# Altium PCB Module Hub.PcbDoc
Units mil, origin at the board's own origin, x right, y up, seen from the top; angles counter-clockwise.
Board outline 5205 x 1250 mil, 2 copper layers (Top Layer, Bottom Layer); 57 components, 50 nets, 236 pads, 153 vias.
Unrouted connection lines stored in the file: 2.
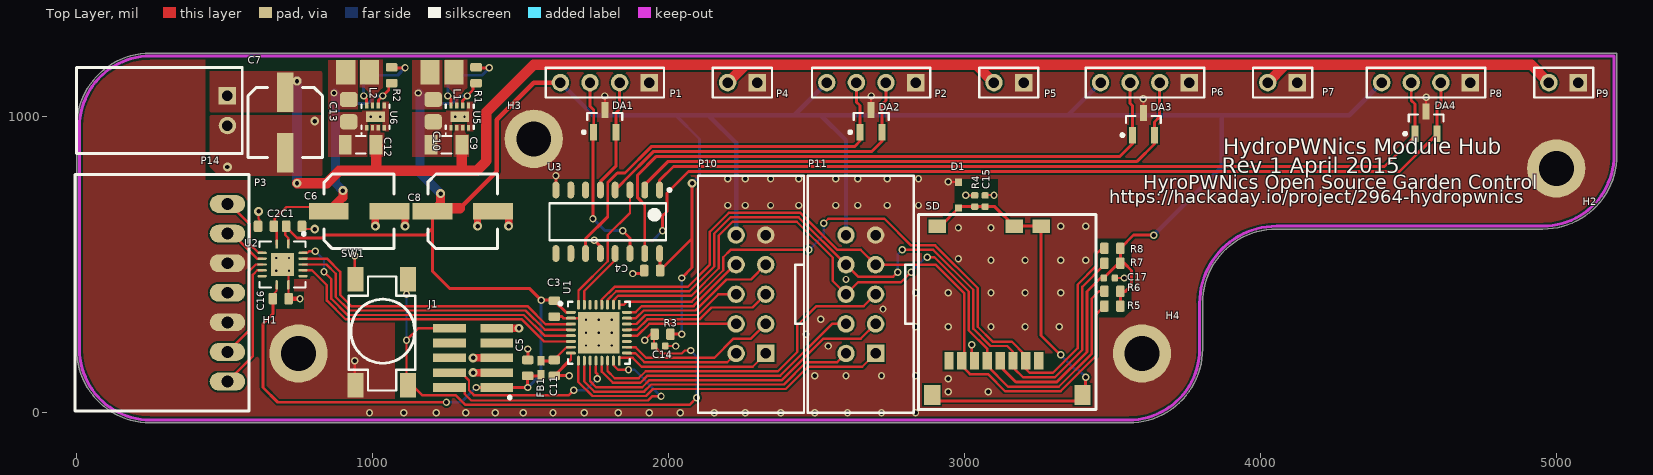
[diagram p0: Top Layer view]
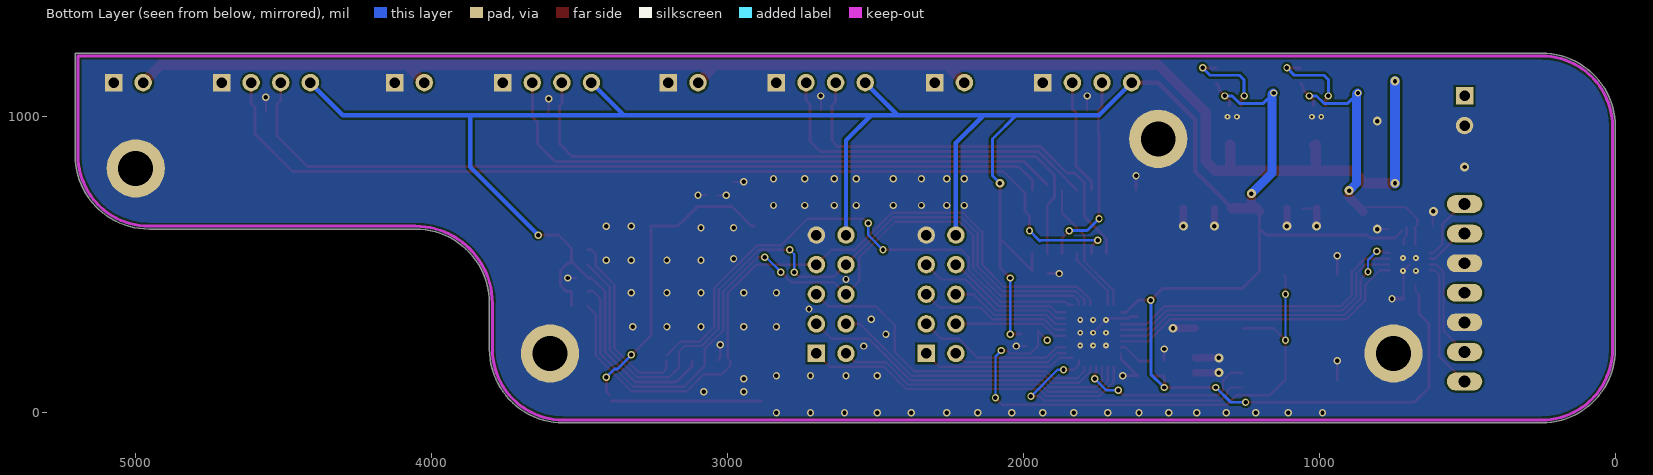
[diagram p1: Bottom Layer view, seen from below]

## Layer stack, top to bottom
Top Solder: solder mask 0.4, Solder Resist, Dk 3.5
Top Layer: signal copper 1.4
Dielectric 1: dielectric 12.6, FR-4, Dk 4.8
Bottom Layer: signal copper 1.4
Bottom Solder: solder mask 0.4, Solder Resist, Dk 3.5

## Board outline
250,-35 cw(c250,215) 0,215 0,965 cw(c250,965) 250,1215 5205,1215 5205,870 cw(c4955,870) 4955,620 4055,620 ccw(c4055,370) 3805,370 3805,215 cw(c3555,215) 3555,-35

## Design rules (kind name [scope] priority, off if disabled: settings)
Clearance [All] p1: gap=7
PlaneConnect [All] p1: planeconnectstyle=Direct reliefexpansion=20 reliefentries=4 reliefconductorwidth=10 reliefairgap=10
PolygonConnect [All] p1: connectstyle=Direct reliefconductorwidth=10 reliefentries=4 polygonreliefangle="90 Angle" airgapwidth=10
RoutingVias [All] p1: holewidth=28 width=50 viastyle="Through Hole" minholewidth=28 minwidth=50 maxholewidth=28 maxwidth=50
SolderMaskExpansion [All] p1: expansion=4
UnpouredPolygon [All] p1: allowunpoured=FALSE
Width [All] p1: maxlimit=100 minlimit=7 preferedwidth=8
28 further rules are at their usual default settings.

## Components (designator, comment, footprint, x,y, rotation, side; value= is the part's Value field where it differs from the comment)
C1 "100nF" C0603 735,630 r0 top
C2 "100nF" C0603 640,630 r180 top
C3 "100nF" C0603 1614.49,351.26 r270 top
C4 "100nF" C0603 1945,480 r180 top
C5 "0603" C0603 1524.49,151.26 r270 top
C6 "EEE-1VA101XP" EEE-1VA101XP 955,680 r180 top
C7 "EEE-1VA101XP" EEE-1VA101XP 705,980 r90 top
C8 "EEE-1VA101XP" EEE-1VA101XP 1305,680 r180 top
C9 "10uF 50V" C1206 1250,905 r180 top
C10 "0603" C0805 1205,1020 r90 top
C11 "0603" C0603 1614.49,151.26 r90 top
C12 "10uF 50V" C1206 960,905 r180 top
C13 "0603" C0805 920,1020 r90 top
C14 "100nF" C0402 1970,225 r0 top
C15 "0402" C0402 3070,715 r270 top
C16 "100nF" C0603 690,385 r0 top
C17 "0402" C0402 3490,455 r180 top
D1 "RSB39VTE-17" SOD323-R 2980,735 r270 top
DA1 "PESDxL2BT" SOT95P230X110-3N 1785,985 r90 top
DA2 "PESDxL2BT" SOT95P230X110-3N 2685,985 r90 top
DA3 "PESDxL2BT" SOT95P230X110-3N 3605,975 r90 top
DA4 "PESDxL2BT" SOT95P230X110-3N 4560,980 r90 top
FB1 "BLM15HG601SN1D" BLM18PG121SN1D 1569.49,151.26 r90 top
H1 "M3 Hole" Hole-3mm#1 750,200 r0 top
H2 "M3 Hole" Hole-3mm#2 5060,805 r0 top
H3 "M3 Hole" Hole-3mm#3 1550,835 r0 top
H4 "M3 Hole" Hole-3mm#4 3610,270 r0 top
J1 "FTSH-105-XX-X-DV" FTSH-105-XX-X-DV 1340,185 r270 top
L1 "VLS252012T-2R2M1R3" VLS252012T-2R2M1R3 1235,1150 r180 top
L2 "VLS252012T-2R2M1R3" VLS252012T-2R2M1R3 950,1150 r180 top
P1 "Header 4" HDR1X4 1935,1115 r180 top
P2 "Header 4" HDR1X4 2835,1115 r180 top
P3 "Molex - 0705430006" 0705530041 510,705 r270 top
P4 "Header 2" HDR1X2 2300,1115 r180 top
P5 "Header 2" HDR1X2 3200,1115 r180 top
P6 "Header 4" HDR1X4 3760,1115 r180 top
P7 "Header 2" HDR1X2 4125,1115 r180 top
P8 "Header 4" HDR1X4 4710,1115 r180 top
P9 "Header 2" HDR1X2 5075,1115 r180 top
P10 "CNCTech 3020-10-0100-00" 3020-10-0100-00 2328.79,400 r90 top
P11 "CNCTech 3020-10-0100-00" 3020-10-0100-00 2700,400 r90 top
P14 "Molex 0705530001" 0705530001 510,1070 r270 top
R1 "100K" R0603 1350,1140 r270 top
R2 "100K" R0603 1065,1140 r270 top
R3 "1K" R0603 1980,265 r0 top
R4 "1M" R0402 3035,715 r270 top
R5 "4.7K" R0603 3500,360 r0 top
R6 "4.7K" R0603 3500,410 r0 top
R7 "4.7K" R0603 3500,505 r0 top
R8 "4.7K" R0603 3500,555 r0 top
SD "502570-0893" "502570-0893 - Molex SD" 3145,340 r180 top
SW1 "TL3301AF160QG" TL3301AF160QG 1120,450 r270 top
U1 "MKV10Z16VFM7 - 32 Pin QFN 5X5" MKV10Z16VFM7 1765,270 r0 top locked
U2 "TXS0104E" "RGY  (S-PVQFN-N14)" 696.1,500.63 r270 top
U3 "74HC4052" 74HC4052 1795,645 r270 top
U5 "TPS62162DSG" DSG8-1600X900TP 1295,1000 r90 top
U6 "TPS62163DSG" DSG8-1600X900TP 1010,1000 r90 top

## Footprints (in the part's own frame and the unit in brackets; to place one, negate y for a bottom-side part, rotate by r counter-clockwise, add the part's x,y. Pads: shape width x height; smd on the part's side, far side on the other; paste and mask are expansions set on the pad)
74HC4052 [mm] "SOIC, 16-Leads, Body 9.90x3.90mm, Pitch 1.27mm, IPC Medium Density"
  oval 1.45x0.6 smd: 1(-2.725,4.445) 2(-2.725,3.175) 3(-2.725,1.905) 4(-2.725,0.635) 5(-2.725,-0.635) 6(-2.725,-1.905) 7(-2.725,-3.175) 8(-2.725,-4.445) 9(2.725,-4.445) 10(2.725,-3.175) 11(2.725,-1.905) 12(2.725,-0.635) 13(2.725,0.635) 14(2.725,1.905) 15(2.725,3.175) 16(2.725,4.445)
  silkscreen extent -2.85,-5 1.6,5.42, body extent -2,-5 2,5, height 1.75
3020-10-0100-00 [mm] "2.54mm pitch 2X5 1 Pin Shrouded Connector"
  rect 1.5x1.5 hole 0.9: 1(-5.08,0)
  round 1.5 hole 0.9: 2(-5.08,2.54) 3(-2.54,0) 4(-2.54,2.54) 5(0,0) 6(0,2.54) 7(2.54,0) 8(2.54,2.54) 9(5.08,0) 10(5.08,2.54)
  silkscreen extent -10.16,-3.28 10.16,5.82, body extent -10.16,-3.3 10.16,5.84, height 9.1
"502570-0893 - Molex SD" [mm] "Molex SD Card Footprint 502570-0893"
  rect 0.8x1.5 smd: 1(-2.692,4.191) 2(-1.592,4.191) 3(-0.492,4.191) 4(0.608,4.191) 5(1.708,4.191) 6(2.808,4.191) 7(3.908,4.191) 8(5.008,4.191)
  rect 1.4x1.7 smd: 9(-6.452,7.112) 10(6.452,7.112)
  rect 1.5x1.15 smd: 11(-2.896,-7.366) 12(-0.61,-7.366) 13(5.994,-7.366)
  silkscreen extent -7.62,-8.38 7.62,8.38, body extent -6.86,-7.75 6.94,7.75, height 1.85
0705530001 [mm]
  rect 1.5x1.5 hole 0.9: 1(0,0)
  round 1.5 hole 0.9: 2(2.54,0)
  silkscreen extent -2.44,-12.95 4.95,1.27, body extent -2.41,-12.88 4.95,0.71, height 6.96
0705530041 [mil] "Molex - 0705530041"
  oval 60x120 hole 40: 1(0,0) 2(100,0) 3(200,0) 4(300,0) 5(400,0) 6(500,0) 7(600,0)
  silkscreen extent -100,-515 700,73, body extent -100,-510 700,25, height 262
BLM18PG121SN1D [mm] "Chip Inductor, 2-Leads, Body 1.0x0.5mm, IPC Medium Density"
  rect 0.8x0.6 smd: 1(-0.6,0) 2(0.6,0)
  body extent -0.52,-0.28 0.53,0.27, height 0.6
C0402 [mil]
  rrect40% 22x24 smd: 1(-18.7,0) 2(19,0)
  body extent -20,-10 20,10, height 20
C0603 [mm]
  rrect40% 0.74x1 smd: 1(-0.68,0) 2(0.68,0)
  body extent -0.8,-0.4 0.8,0.4, height 0.8
C0805 [mil]
  rrect50% 52x60 smd: 1(-37.4,0) 2(38,0)
  body extent -40,-30 40,30, height 35
C1206 [mm]
  rect 1.1x1.7 smd: 1(-1.325,0) 2(1.325,0)
  silkscreen extent -0.4,-0.75 0.4,0.75, body extent -1.68,-0.87 1.67,0.88, height 1.6
DSG8-1600X900TP [mm] "SON, 8-Leads, Body 2x2mm, Pitch 0.5mm, Thermal Pad 1.6x0.9mm, TI Recommended"
  rect 0.5x0.28 smd paste-0.14 mask+0.07: 1(-0.95,0.75) 2(-0.95,0.25) 3(-0.95,-0.25) 4(-0.95,-0.75) 5(0.95,-0.75) 6(0.95,-0.25) 7(0.95,0.25) 8(0.95,0.75)
  rect 0.9x1.6 smd paste-0.45 mask+0.07: 9(0,0)
  silkscreen extent -1.5,-1.2 1.05,1.25, body extent -1.05,-1.05 1.05,1.05, height 0.8
EEE-1VA101XP [mm] "Panasonic VS D EEE-1VA101XP"
  rect 3.4x1.4 smd: 1(2.6,0) 2(-2.6,0)
  silkscreen extent -3,-3.2 3,3.2, body extent -3.5,-3.3 3.5,3.3, height 5.4
FTSH-105-XX-X-DV [mm] "1.27mm pitch, 10 pin, terminal strip; vertical, SMT"
  rect 0.75x2.8 smd mask+0: 1(2.54,2.03) 2(2.54,-2.03) 3(1.27,2.03) 4(1.27,-2.03) 5(0,2.03) 6(0,-2.03) 7(-1.27,2.03) 8(-1.27,-2.03) 9(-2.54,2.03) 10(-2.54,-2.03)
  silkscreen extent 3.28,3.03 3.52,3.27
HDR1X2 [mm] "Connector; Header; 2 Position"
  rect 1.5x1.5 hole 0.9: 1(0,0)
  round 1.5 hole 0.9: 2(2.54,0)
  silkscreen extent -1.27,-1.27 3.81,1.27
HDR1X4 [mm] "Connector; Header; 4 Position"
  rect 1.5x1.5 hole 0.9: 1(0,0)
  round 1.5 hole 0.9: 2(2.54,0) 3(5.08,0) 4(7.62,0)
  silkscreen extent -1.27,-1.27 8.89,1.27
Hole-3mm#1 [mm]
  round 5 hole 3: 1(0,0)
Hole-3mm#2 [mm]
  round 5 hole 3: 1(-1.524,0.508)
Hole-3mm#3 [mm]
  round 5 hole 3: 1(-0.127,2.286)
Hole-3mm#4 [mm]
  round 5 hole 3: 1(-0.254,-1.778)
MKV10Z16VFM7 [mm] "QFN, 32-Leads, Body 5.00x5.00mm, Pitch 0.50mm, Thermal Pad 3.60x3.60mm, IPC Medium Density"
  oval 0.85x0.25 smd: 1(-2.4,1.75) 2(-2.4,1.25) 3(-2.4,0.75) 4(-2.4,0.25) 5(-2.4,-0.25) 6(-2.4,-0.75) 7(-2.4,-1.25) 8(-2.4,-1.75) 17(2.4,-1.75) 18(2.4,-1.25) 19(2.4,-0.75) 20(2.4,-0.25) 21(2.4,0.25) 22(2.4,0.75) 23(2.4,1.25) 24(2.4,1.75)
  oval 0.25x0.85 smd: 9(-1.75,-2.4) 10(-1.25,-2.4) 11(-0.75,-2.4) 12(-0.25,-2.4) 13(0.25,-2.4) 14(0.75,-2.4) 15(1.25,-2.4) 16(1.75,-2.4) 25(1.75,2.4) 26(1.25,2.4) 27(0.75,2.4) 28(0.25,2.4) 29(-0.25,2.4) 30(-0.75,2.4) 31(-1.25,2.4) 32(-1.75,2.4)
  rect 3.556x3.556 smd: 33(0,0)
  silkscreen extent -3.42,-2.65 2.65,2.65, body extent -2.5,-2.5 2.5,2.5, height 1
R0402 [mil]
  rrect40% 22x24 smd: 1(-18.9,0) 2(19,0)
  body extent -20,-10 20,10, height 14
R0603 [mm]
  rrect40% 0.74x1 smd: 1(-0.68,0) 2(0.68,0)
  body extent -0.8,-0.4 0.8,0.4, height 0.8
"RGY  (S-PVQFN-N14)" [mm] "QFN, 16-Leads, Body 3.50x3.50mm, Pitch 0.50mm, Thermal Pad 2.00x2.00mm, IPC Medium Density"
  oval 0.8x0.2 smd: 1(-1.75,0.5) 7(1.75,0.5) 8(1.75,-0.5) 14(-1.75,-0.5)
  oval 0.2x0.8 smd: 2(-1,1.75) 3(-0.5,1.75) 4(0,1.75) 5(0.5,1.75) 6(1,1.75) 9(1,-1.75) 10(0.5,-1.75) 11(0,-1.75) 12(-0.5,-1.75) 13(-1,-1.75)
  rect 2x2 smd: 15(0,0)
  silkscreen extent -2.75,-1.97 1.97,1.97, body extent -1.83,-1.83 1.83,1.83, height 1
SOD323-R [mil]
  rect 24x24 smd: A(44,0) C(-43.31,0)
  body extent -50,-31 50,31, height 28
SOT95P230X110-3N [mm]
  rect 1.4x0.6 smd: 1(-0.95,0.95) 2(-0.95,-0.95) 3(0.95,0)
  silkscreen extent -1.07,-1.5 0.7,1.92, body extent -0.7,-1.5 0.7,1.5, height 1.1
TL3301AF160QG [mm] "TL3301AF160QG Tactile Switch"
  rect 2.1x1.4 smd: 1(0,0) 1(9.1,0) 2(0,-4.5) 2(9.1,-4.5)
  silkscreen extent -0.25,-5.08 9.53,0.64, body extent -0.43,-5.26 9.57,0.74, height 5.11
VLS252012T-2R2M1R3 [mm] "Precision Wire Wound Inductor, 2-Leads, Body 2.5x2.0mm, IPC Medium Density"
  rect 1.65x2.1 smd: 1(-1.025,0) 2(1.025,0)
  body extent -1.3,-1.05 1.3,1.05, height 1.2

## Part data
C1 C2 C3 C4 C16: library part C0603C104K5RACTU, "CAP CER 0603 100nF 50V 10% X7R"
C5 C11: library part C1608JB0J106K080AB, "CAP CER 10UF 6.3V 10% JB 0603"
C6 C7 C8: "CAP ALUM 100UF 35V 20% SMD"
C9 C12: library part CL31A106KBHNNNE, "CAP CER 10UF 50V 10% X5R 1206"
C10 C13: library part CL21A226KQQNNNE, "CAP CER 22UF 6.3V 10% X5R 0805"
C14: library part GRM155R71C104KA88D, "CAP CER 0402 100nF 16V 10% X7R"
C15 C17: library part GRM155R60J474KE19D, "0.47uF 6.3v C0402 - GRM155R60J474KE19D"
D1: "DIODE TVS"
DA1 DA2 DA3 DA4: "PESDxL2BT TVS Diode Array 2x"
H1 H2 H3 H4: library part Hole, "3mm Hole"
J1: library part "ARM Cortex JTAG-DEBUG Header"
P1 P2 P6 P8: "Header, 4-Pin"
P3: library part 0705530041, "0705530041"
P4 P5 P7 P9: "Header, 2-Pin"
P10 P11: library part 3020-10-0100-00
P14: library part 0705530001, "Molex 0705530002 Right Angle 2.54mm Shrouded Header"
R1 R2: library part RC0603FR-07100KL, "RES 100K OHM 1/10W 1% 0603 SMD"
R3: library part ERJ-3EKF1001V, "RES 0603 1K 100mW 1%"
R4: library part ERJ2GEJ105X, "RES 0402 1M 100mW 5%"
R5 R6 R7 R8: library part ERJ3EKF4701V, "RES 0603 4.7K 100mW 1%"
SD: "microSD 502570-0893 Molex Part"
U1: library part MKV10Z16VFM7, "IC MCU ARM Cortex M0+ 16KB 32QFN 75MHZ"
U2: "TXS0104E - Bidriectional Opendrain/pushpull level shift"
U3: "Dual 4-channel analog multiplexer/demultiplexer"
U5 U6: library part TPS62162SOP

## Via types
v1: diameter 25, hole 15, Top Layer to Bottom Layer, 120 vias
v2: diameter 19.68, hole 7.87, Top Layer to Bottom Layer, 17 vias
v3: diameter 30, hole 15, Top Layer to Bottom Layer, 16 vias

## Nets (pads, with @x,y where several pads share a name; then routed paths per layer and width w, separated by ;. In a path a pad name is that pad's centre, name@x,y a point inside that pad or via, vN(x,y) a via of type N, cw(c..) or ccw(c..) an arc to the next point about the centre after c; other vN are vias at no path point)
3.3VCC: C1.1 C3.1 C4.1 C5.2 C8.1 C10.2 C16.1 C17.2 FB1.1 J1.1 L1.2 P1.4 P2.4 P6.4 P8.4 P10.10 P11.10 R1.2 R3.2 R5.2 R6.2 R7.2 R8.2 SD.4 U1.1 U2.1 U2.8 U3.16 U5.6 | length 11132.3
  Top Layer w7: C16.1@663.23,398.23 676.42,411.42 U2.8
  Top Layer w8: C1.1@705,625 705,600 715.79,589.21 U2.1
  Top Layer w10: C16.1@663.23,398.23 C16.1 663.23,333.23 630,300 630,85 680,35 v1(1250,35) ; C1.1@721.61,613.39 745,590 830,590 840,600 1180,600 1202.64,622.64 ; C8.1 1202.64,622.64 ; U5.6 1304.84,1054.84 v1(1320,1070) 1340,1090 1340,1103.22 R1.2 ; v1(1350,85) J1.1 v1(1525,85) 1524.49,85.51 C5.2 1566.34,124.49 FB1.1 ; U1.1 1653.62,338.9 C3.1 1612.52,380 v1(1570,380) 1530,420 1260,420 1202.64,477.36 1202.64,622.64 ; U3.16 1971.77,535.94 C4.1 2080,588.23 ; R3.2 v1(2045,265) ; v1(2045,455) 2080,490 2080,588.23 ; v3(2080,775) 2080,588.23 ; SD.4 3121.06,156.06 3173.65,103.47 3312.31,103.47 3414,205.16 3414,409 3460,455 C17.2 ; C17.2 3521.04,505 R7.2 ; R5.2 R6.2 3545,410 3565,430 3565,480 3540,505 R7.2 ; v1(3640,600) 3571.77,600 R8.2 R7.2
  Top Layer w15: 1295,690 1420,815 1420,990 1545,1115 P1.4
  Top Layer w30: C8.1 1212.64,690 1230,707.36 v3(1230,740)
  Top Layer w35: C8.1@1212.64,690 1295,690
  Bottom Layer w10: v1(1155,1080) 1160,1075 1190,1045 1270,1045 1295,1070 v1(1320,1070) ; v1(1250,35) 1300,35 v1(1350,85) ; v1(1525,85) 1570,130 v1(1570,380) ; 2025,1005 2105,925 2105,800 v3(2080,775) ; v1(2045,265) v1(2045,455)
  Bottom Layer w15: P1.4 1745,1005 2025,1005 2135,1005 ; P10.10 2228.79,911.21 2135,1005 ; P2.4 2425,1005 ; P11.10 2600,920 2515,1005 ; P6.4 3350,1005 ; v1@3645,605 3870,830 3870,1005 ; P8.4 4300,1005 3870,1005 ; 2135,1005 2425,1005 ; 2425,1005 2515,1005 ; 2515,1005 3350,1005 ; 3350,1005 3870,1005
  Bottom Layer w30: v1@1157,1080 1160,1077 1160,1075 1160,810 v3(1230,740)
5VCC: C2.1 C6.1 C13.2 L2.2 P3.4 R2.2 U2.14 U6.6 | length 990.3
  Top Layer w8: U2.14 676.42,626.42 670,632.83 670,655 710,695 C6.1@840,695
  Top Layer w10: U6.6 1019.84,1054.84 v1(1035,1070) 1055,1090 1055,1103.22 R2.2
  Top Layer w30: C6.1 900,727.36 v3(900,750)
  Bottom Layer w10: v1(870,1080) 875,1075 905,1045 985,1045 1010,1070 v1(1035,1070)
  Bottom Layer w30: v1@872,1080 875,1077 875,1075 875,775 v3(900,750)
12VCC: C7.1 C9.1 C12.1 P4.2 P5.2 P7.2 P9.2 P14.1 U5.2 U5.3 U6.2 U6.3 | length 5296.4
  Top Layer w30: C12.1@1017.17,905 C12.1@1020,902.17 ; C9.1 C9.1@1305,902.17
  Top Layer w35: v3(745,775) 845,775 887.17,817.17 1302.17,817.17 ; 1012.17,822.17 C12.1 ; C9.1 1302.17,817.17 ; P4.2 2260.5,1175.5 3039.5,1175.5 P5.2 ; 2260,1175 1545,1175 1385,1015 1385,850 1352.17,817.17 1302.17,817.17 ; 3039.5,1175 4085,1175 ; P7.2 4085,1175 ; P9.2 4915,1175 4085,1175
  Bottom Layer w35: v3(745,775) v3(745,1120)
EXP0: P10.1 U1.16 | length 524.4
  Top Layer w8: U1.16@1835,185 1879.49,185 1909.49,155 2285,155 P10.1@2328.79,198.79
EXP1: P10.2 U1.17 | length 394.6
  Top Layer w8: U1.17 1887.68,201.1 1918.79,170 2198.79,170 P10.2
EXP2: P10.3 U1.18 | length 531.8
  Top Layer w8: U1.18 1889.21,220.79 1925,185 2155,185 2220,250 2278.79,250 P10.3
EXP3: P10.4 U1.20 | length 385.8
  Top Layer w8: U1.20 1895.16,260.16 1935,300 P10.4
EXP4: P10.5 U1.21 | length 519.1
  Top Layer w8: U1.21 1893.63,279.84 1928.79,315 2105,315 2145,355 2283.79,355 P10.5
EXP5: P10.6 U1.22 | length 410.9
  Top Layer w8: U1.22 1892.1,299.53 1922.57,330 2098.79,330 2168.79,400 P10.6
EXP6: P10.7 U1.23 | length 544.2
  Top Layer w8: U1.23 1890.57,319.21 1916.36,345 2091.36,345 2196.36,450 2278.79,450 P10.7
EXP7: P10.8 U1.24 | length 436
  Top Layer w8: U1.24 1889.04,338.9 1910.15,360 2085.15,360 2225.15,500 P10.8
EXP8: P11.1 U1.9 | length 1136.9
  Top Layer w8: 1695.59,156.77 1695.59,103.75 1743.34,56 1924.09,56 1948.09,80 2396.22,80 2471.22,155 2655,155 P11.1
EXP9: P11.3 U1.11 | length 1112.3
  Top Layer w8: 1734.96,156.77 1734.96,106.81 1755.77,86 1911.66,86 1935.66,110 2383.8,110 2523.8,250 2650,250 P11.3
EXP10: P11.2 U1.10 | length 1003.9
  Top Layer w8: 1715.28,156.77 1715.28,105.28 1749.55,71 1917.87,71 1941.87,95 2390.01,95 2465.01,170 2570,170 P11.2
EXP11: P11.5 U1.14 | length 1103.1
  Top Layer w8: 1794.02,156.77 1794.02,140.6 1818.62,116 1899.23,116 1923.23,140 2370,140 2435,205 2435,295 2500,360 2582.69,360 2583.21,359.47 2659.47,359.47 P11.5
EXP12: P11.4 U1.13 | length 941.8
  Top Layer w8: 1774.33,156.77 1774.33,143.5 1774.73,143.5 1774.73,138.67 1812.4,101 1905.45,101 1929.45,125 2377.59,125 2552.59,300 P11.4
GND: C1.2 C2.2 C3.2 C4.2 C5.1 C6.2 C7.2 C8.2 C9.2 C10.1 C11.1 C12.2 C13.1 C14.2 C15.1 C16.2 C17.1 D1.C DA1.3 DA2.3 DA3.3 DA4.3 H1.1 H2.1 H3.1 H4.1 J1.3 J1.5 J1.9 P1.1 P2.1 P3.3 P3.5 P4.1 P5.1 P6.1 P7.1 P8.1 P9.1 P10.9 P11.9 P14.2 R4.1 SD.6 SW1.2 U1.2 U1.8 U1.33 U2.7 U2.15 U3.8 U5.1 U5.4 U5.5 U5.9 U6.1 U6.4 U6.5 U6.9 | length 1732.4
  Top Layer w7: v3@615,675 615,655 618.23,651.77 C2.2@618.23,630 ; U2.15@715.79,480.94 U2.7 715.79,385.98 C16.2 ; C1.2@766.77,620 v3(805,620) ; v1(940,175) 940,109.57 SW1.2@942.83,106.73 ; v1(940,530) 940,467.83 SW1.2@942.83,465 ; C6.2@1010,690 C6.2@1057.36,690 ; 1670,180 1670.51,180.51 U1.8 ; U1.33@1715.79,319.21 v2(1721.69,313.31) v2(1765,270) ; DA1.3 v1(1785,1070) ; C14.2 v1(2025,225) ; DA2.3 v1(2685,1070) ; v1(2945,780) 2978.31,780 D1.C ; v1(3005,735) 3006.1,733.9 R4.1 ; v1(3025,230) 3025,184.45 SD.6 ; C15.1@3071.3,735 v1(3100,735) ; C17.1 v1(3540,455) ; DA3.3 v1(3605,1060) ; DA4.3 v1(4560,1065)
  Top Layer w9: 1645.79,319.21 U1.2 U1.33@1715.79,319.21
  Top Layer w10: U2.15 U2.15@715.79,480.94 ; C5.1 1525,178.54 v1(1525,215) ; C11.1 C11.1@1615,125 ; C3.2 1640.51,324.49 1645.79,319.21 ; U3.8 v1(1620,800) ; v1(1665,125) C11.1@1615,125 ; 1670,180 C11.1@1615,125 ; v1(1880,470) C4.2@1918.23,470
  Top Layer w15: C16.2 v1(755,385)
  Top Layer w25: v3(1010,630) C6.2@1010,690 ; v3@1110,640 C6.2@1110,690 ; v3(1340,135) J1.3 ; v3(1340,185) J1.5 ; v3@1355,640 C8.2@1355,690 ; J1.9 v3(1495,285) ; v3@1460,640 C8.2@1460,690
  other v1: 990,0 1105,0 1215,0 1315,0 1415,0 1510,0 1610,0 1715,0 1830,0 1935,0 2040,0 2155,0 2260,0 2380,0 2495,0 2605,0 2720,0 2835,0 2945,70 3080,70 2945,115 2495,125 2600,125 2720,125 2835,125 2540,225 2465,265 2835,290 2945,290 3090,290 3205,290 3320,290 2515,315 2725,350 2835,405 2945,405 3090,405 3205,405 3325,405 2600,450 3090,515 3205,515 3325,515 3410,515 2980,520 2980,625 3090,625 3325,630 3410,630 2200,700 2260,700 2345,700 2440,700 2565,700 2640,700 2740,700 2845,700 2200,790 2260,790 2345,790 2440,790 2565,790 2640,790 2740,790 2845,790
  other v2: 1721.69,226.69 1765,226.69 1808.31,226.69 1721.69,270 1808.31,270 1765,313.31 1808.31,313.31 674.45,478.98 717.76,478.98 674.45,522.28 717.76,522.28 994.25,1000 1025.75,1000 1279.25,1000 1310.75,1000
  other v3: 1110,630 1355,630 1460,630 615,680 510,830 805,985
NetC11_2: C11.2 FB1.2 U1.7 | length 116.4
  Top Layer w8: C11.2 1614.49,179.41 1655.87,220.79 U1.7
  Top Layer w10: FB1.2 C11.2@1611.34,174.88
NetC15_2: C15.2 D1.A R4.2 SD.9 SD.10 SD.11 SD.12 SD.13 | length 1555.6
  Top Layer w10: SD.10@2886,40 SD.9@3394,40 ; SD.13 2919,630 D1.A 2985,696 R4.2 C15.2 3103,696 SD.12 SD.11 3259,261 v1(3325,195) ; SD.9 3410,71 v1(3410,120)
  Bottom Layer w10: v1(3325,195) 3372.5,147.5 3382.5,147.5 v1(3410,120)
NetL1_1: L1.1 U5.7
NetL2_1: L2.1 U6.7
NetR1_1: R1.1 U5.8 | length 294.2
  Top Layer w10: v1(1255,1070) 1265.47,1059.53 U5.8 ; R1.1 1351.77,1165 v1(1395,1165)
  Bottom Layer w10: v1(1255,1070) 1255,1125 1270,1140 1370,1140 v1(1395,1165)
NetR2_1: R2.1 U6.8 | length 294.2
  Top Layer w10: v1(970,1070) 980.47,1059.53 U6.8 ; R2.1 1066.77,1165 v1(1110,1165)
  Bottom Layer w10: v1(970,1070) 970,1125 985,1140 1085,1140 v1(1110,1165)
RESET: C14.1 J1.10 R3.1 SW1.1 U1.19 | length 1942.4
  Top Layer w8: SW1.1@1115,106.73 v1(1115,245) 1155,285 J1.10 ; v1(1115,400) 1115,460 SW1.1@1120,465 ; SW1.1@1120,106.73 1167.5,59.24 1280.76,59.24 1314,26 2071,26 v1(2095,50) ; v1(1920,245) 1951.3,276.3 C14.1 1976.3,200 2045,200 2055,210 v1(2075,210)
  Bottom Layer w8: v1(1115,245) v1(1115,400) ; v1(2075,210) 2095,190 v1(2095,50)
SD_CS: R8.1 SD.2 U1.25 | length 2428
  Top Layer w8: U1.25 1849.49,364.49 1860,375 2078.64,375 2185,481.36 2185,525 2210,550 v1(2475,550) ; v1(2525,640) 2540,655 2730,655 2820,565 2901.21,565 3045,421.21 3045,290 3095,240 3160.2,240 3205,195.2 SD.2@3205,195 ; SD.2 3207.69,147.31 3220.53,134.47 3299.47,134.47 3383,218 3383,433 3445,495 3445,535 3460,550 R8.1@3473.23,550
  Bottom Layer w8: v1(2475,550) 2525,600 v1(2525,640)
SM0_RX: DA1.2 P1.2 U3.5 | length 389.6
  Top Layer w10: U3.5 1770,780 1822.4,832.4 DA1.2 1822.4,1012.4 1835,1025 P1.2
SM0_TX: DA1.1 P1.3 U3.14 | length 670.5
  Top Layer w10: P1.3 1735,1035 1747.6,1022.4 DA1.1 1745,945 v1(1745,655) ; v1(1845,615) 1870,590 U3.14
  Bottom Layer w10: v1(1745,655) 1785,615 v1(1845,615)
SM1_RX: DA2.2 P2.2 U3.4 | length 1173.9
  Top Layer w10: U3.4 1846.19,778.47 1846.19,778.88 1950.31,883 2688,883 2722.4,917.4 DA2.2 2722.4,1042.4 2735,1055 P2.2
SM1_TX: DA2.1 P2.3 U3.11 | length 1384.2
  Top Layer w10: U3.11 1720,587.15 1795,662.15 1795,777.69 1827.14,809.83 1853.1,809.83 1943.27,900 2630,900 2647.6,917.6 DA2.1 2647.6,1037.4 2635,1050 P2.3
SM2_RX: DA3.2 P6.2 U3.2 | length 1994.2
  Top Layer w10: U3.2@1920,770 1999,849 3584,849 3642.4,907.4 DA3.2 3642.4,982.4 3660,1000 P6.2
SM2_TX: DA3.1 P6.3 U3.15 | length 2200.5
  Top Layer w10: U3.15 1920,701.88 1896.19,725.69 1896.19,803.11 1959.08,866 3526,866 3567.6,907.6 DA3.1 3567.6,1037.4 3560,1045 P6.3
SM3_RX: DA4.2 P8.2 U3.12 | length 3294.9
  Top Layer w10: v1(1750,582.5) 1770,562.5 U3.12 ; v1(1980,615) 1980,665 1995,680 1995,742 2068,815 4469.8,815 DA4.2 4597.4,1032.4 4610,1045 P8.2
  Bottom Layer w10: v1(1750,582.5) 1942.5,582.5 1945,580 v1(1980,615)
SM3_TX: DA4.1 P8.3 U3.1 | length 2832.7
  Top Layer w10: U3.1 1970,785 2017,832 4419.6,832 4522.6,935 DA4.1 4522.6,1042.4 4510,1055 P8.3
SPI0_MISO: P11.7 R5.1 SD.7 U1.28 | length 2508.8
  Top Layer w8: U1.28 1774.84,382.19 1817.66,425 2065,425 2140,500 2140,610.95 2204.05,675 2446.21,675 2571.21,550 2650,550 P11.7 2902.57,500 3000,402.57 3000,183.86 SD.7 2991.14,157.48 3018.62,130 3080,130 3137.53,72.47 3325.15,72.47 3445,192.32 3445,331.77 R5.1
SPI0_MOSI: P11.8 R7.1 SD.3 U1.27 | length 2601.8
  Top Layer w8: U1.27 1794.53,380.66 1823.87,410 2071.21,410 2155,493.79 2155,604.74 2210.26,660 2440,660 P11.8 2640.53,459.47 2759.47,459.47 v1(2775,475) ; v1(2790,550) 2895,550 3030,415 3030,283.79 3088.79,225 3145,225 3164.37,205.63 SD.3 3164.37,149.47 3168.15,149.47 3198.15,119.47 3305.69,119.47 3398,211.79 3398,424.77 R7.1@3473.23,500
  Bottom Layer w8: v1(2775,475) 2775,535 v1(2790,550)
SPI0_SCK: P11.6 R6.1 SD.5 U1.26 | length 2582.7
  Top Layer w8: U1.26 1814.21,379.13 1830.08,395 2077.43,395 2170,487.57 2170,598.53 2216.47,645 2433.79,645 2555,523.79 2555,445 P11.6 2640.53,440.53 2785.53,440.53 v1(2820,475) ; v1(2875,525) 2898.79,525 3015,408.79 3015,277.57 3077.76,214.82 SD.5 3077.76,157.48 3147.76,87.47 3318.94,87.47 3430,198.53 3430,385 3455,410 R6.1
  Bottom Layer w8: v1(2820,475) 2870,525 v1(2875,525)
TCK/SWDCLK: J1.4 U1.12 | length 617.9
  Top Layer w8: J1.4 1300,135 1326.2,108.8 1326.2,75.57 1342.53,59.24 1664.24,59.24 v1(1680,75) ; 1754.65,156.77 1754.65,135.35 1760,130 v1(1760,115)
  Bottom Layer w8: v1(1680,75) 1720,75 v1(1760,115)
TDI: J1.8
TDO/SWO: J1.6
TMS/SWDIO: J1.2 U1.15 | length 964.3
  Top Layer w8: J1.2 1300,85 1311.2,73.8 1311.2,63.8 1334,41 1931,41 1945,55 v1(1975,55) ; U1.15@1813.7,175.51 1813.7,161.38 1830.08,145 v1(1865,145)
  Bottom Layer w8: v1(1865,145) 1885,145 v1(1975,55)
UART0_RX: U1.31 U3.13 | length 216.4
  Top Layer w8: U1.31 1715.79,410.79 1820,515 U3.13
UART0_TX: U1.32 U3.3 | length 459.8
  Top Layer w8: U1.32 1696.1,412.32 1795,511.21 1795,600 1870,675 U3.3
UART1_CTS: U1.5 U2.2 | length 1088.1
  Top Layer w8: U2.2 780.47,540 786.1,545.63 v1(806.1,545.63) ; v1(836.1,475.63) 861.1,450.63 861.1,384.85 915.95,330 1511.21,330 1581.06,260.16 U1.5
  Bottom Layer w8: v1(806.1,545.63) 836.1,515.63 v1(836.1,475.63)
UART1_CTS_5V: P3.1 U2.13 | length 224.8
  Top Layer w8: P3.1@517.07,705 585,637.07 585,570 615,540 U2.13
  Top Layer w35: P3.1 P3.1@517.07,705
UART1_RTS: U1.6 U2.5 | length 1035.6
  Top Layer w8: U2.5 795.79,480.94 846.1,430.63 846.1,378.64 909.74,315 1505,315 1579.53,240.47 U1.6
UART1_RTS_5V: P3.7 U2.10 | length 434
  Top Layer w8: P3.7 596,191 596,428.2 596,466 610.94,480.94 U2.10
UART1_RX: U1.4 U2.4 | length 1042.9
  Top Layer w8: U2.4 844.89,500.63 876.1,469.42 876.1,391.06 922.17,345 1517.43,345 1582.58,279.84 U1.4
UART1_RX_5V: P3.6 U2.11 | length 356.8
  Top Layer w8: P3.6 581,276 581,476 605.63,500.63 U2.11
UART1_TX: U1.3 U2.3 | length 1043.7
  Top Layer w8: U2.3 846.42,520.31 891.1,475.63 891.1,397.28 928.38,360 1523.64,360 1584.72,298.92 1670.51,298.92 U1.3
UART1_TX_5V: P3.2 U2.12 | length 152.3
  Top Layer w8: P3.2 525,605 609.68,520.31 U2.12
pads on no net: J1.7 SD.1 SD.8 U1.29 U1.30 U2.6 U2.9 U3.6 U3.7 U3.9 U3.10

## Polygon pours and split planes (outlines as drawn)
GND on Top Layer "Bottom Layer-No Net" (solid, remove dead copper, pour order 35): 1075,35 1075,315 1035,355 890.95,355 869.74,355 859.74,365 846.1,378.64 846.1,425 811.1,460 790,460 790,450 785,450 750,450 735,450 735,410 770,410 770,375 770,360 770,350 700,350 675,350 635,310 630,305 630,85 680,35
GND on Top Layer "Bottom Layer-No Net" (solid, remove dead copper, pour order 33): 435,1205 400,1205 0,1205 0,950 0,-35 1.18,-33.82 221.96,-33.82 2103.82,-33.82 2105,-35 2102.61,-32.61 2102.61,31.63 2031.63,31.63 2025,25 2024,26 1875,26 1314,26 1280.76,59.24 1266.53,45 725,45 620,150 620,180 590,210 580,220 580,550 580,780 585,785 435,785
GND on Top Layer "Bottom Layer-No Net" (solid, remove dead copper, pour order 31): 2074.82,801.5 2075,801.32 2075,-25 2870,-25 2870,670 2940,670 2965,695 2965,800
GND on Top Layer "Bottom Layer-No Net" (solid, remove dead copper, pour order 29): 2845,670 2850,665 3445,665 3445,200 3140,200 3092.57,200 3050,242.57 3037.57,255 3000,255 3000,215 2995,210 2955,210 2925,210 2925,140 3008.62,140 3018.62,130 3080,130 3137.53,72.47 3325.15,72.47 3432.68,180 3480,180 3480,-25 3110,-25 2845,-25 2840,-30
GND on Top Layer "Bottom Layer-No Net" (solid, remove dead copper, pour order 27): 5195,870 5195,630 5200,625 4930,625 4050,625 4045,630 4075,600 4075,350 3800,350 3795,345 3795,-25 3515,-25 3445,-25 3445,315 3450,320 3520,320 3540,320 3555,335 3565,345 3565,450 3565,570 3545,590 3480,590 3115,590 3115,790 3300,790 4760,790 4840,870
GND on Top Layer "Bottom Layer-No Net" (solid, remove dead copper, pour order 25): 1425,1205 1425,790 5195,790 5195,1205
GND on Top Layer "Bottom Layer-No Net" (solid, remove dead copper, pour order 21): 450,1005 450,830 480,800 805,800 830,800 830,1005
12VCC on Top Layer "Bottom Layer-No Net" (solid, remove dead copper, pour order 19): 450,1175 450,1015 830,1015 830,1175
12VCC on Top Layer "Bottom Layer-No Net" (solid, remove dead copper, pour order 10): 1275,865 1275,975 1315,975 1315,950 1315,940 1325,940 1325,865
GND on Top Layer "Bottom Layer-No Net" (solid, remove dead copper, pour order 12): 1135,865 1268,865 1268,983 1320,983 1320,950 1340,950 1340,1050 1319,1050 1319,1020 1310,1020 1250,1020 1250,1015 1135,1015
3.3VCC on Top Layer "Bottom Layer-No Net" (solid, remove dead copper, pour order 14): 1235,1025 1135,1025 1135,1190 1235,1190
NetL1_1 on Top Layer "Bottom Layer-No Net" (solid, remove dead copper, pour order 16): 1290,1028 1290,1057.93 1292.29,1063.47 1310.07,1090.07 1315,1095 1320,1095 1320,1195 1240,1195 1240,1100 1255,1100 1271.46,1083.54 1280,1062.93 1280,1028
12VCC on Top Layer "Bottom Layer-No Net" (solid, remove dead copper, pour order 9): 990,865 990,975 1030,975 1030,950 1030,945 1040,945 1040,865
GND on Top Layer "Bottom Layer-No Net" (solid, remove dead copper, pour order 11): 850,865 983,865 983,983 1035,983 1035,950 1055,950 1055,1050 1034,1050 1034,1020 1025,1020 965,1020 965,1015 850,1015
5VCC on Top Layer "Bottom Layer-No Net" (solid, remove dead copper, pour order 13): 950,1025 850,1025 850,1190 950,1190
NetL2_1 on Top Layer "Bottom Layer-No Net" (solid, remove dead copper, pour order 15): 1005,1028 1005,1057.93 1007.29,1063.47 1025.07,1090.07 1030,1095 1035,1095 1035,1195 955,1195 955,1100 970,1100 986.46,1083.54 995,1062.93 995,1028
GND on Bottom Layer "Bottom Layer-No Net" (solid, remove dead copper, pour order 23): 0,1217.59 0,-25 3800,-25 3800,365 3795,370 4050,370 4050,615.39 4055,620.39 4055.39,620 5200,620 5200,1175 5152.45,1222.55

## Keep-outs
Keep-Out Layer:
  lines w10: 10,215 ccw(c250,215) 250,-25 3555,-25 ccw(c3555,215) 3795,215 3795,370 cw(c4055,370) 4055,630 4955,630 ccw(c4955,870) 5195,870 5195,1205 250,1205 ccw(c250,965) 10,965 10,215

## Silkscreen, mask and mechanical layers (free items; w line width, h text height)
Top Overlay:
  lines w7.87: 2099.65,0 2457.92,0 ; 2099.65,800 2457.92,800 ; 2470.87,0 2829.13,0 ; 2470.87,800 2829.13,800
  text "HydroPWNics Module Hub" at 3875,855 h90
  text "Rev 1 April 2015" at 3870,790 h90
  text "HyroPWNics Open Source Garden Control" at 3605,740 h80
  text "https://hackaday.io/project/2964-hydropwnics" at 3489.62,692.19 h75
Mechanical 15:
  the board outline again, w10